# Altium PCB P502EA.PcbDoc
Units mm, origin at the board's own origin, x right, y up, seen from the top; angles counter-clockwise.
Board outline 25 x 69.4 mm, 4 copper layers (Top Layer, Int1, Int2, Bottom Layer), stack 1.547 mm thick; 3 components, 4 nets, 18 pads, 35 vias.
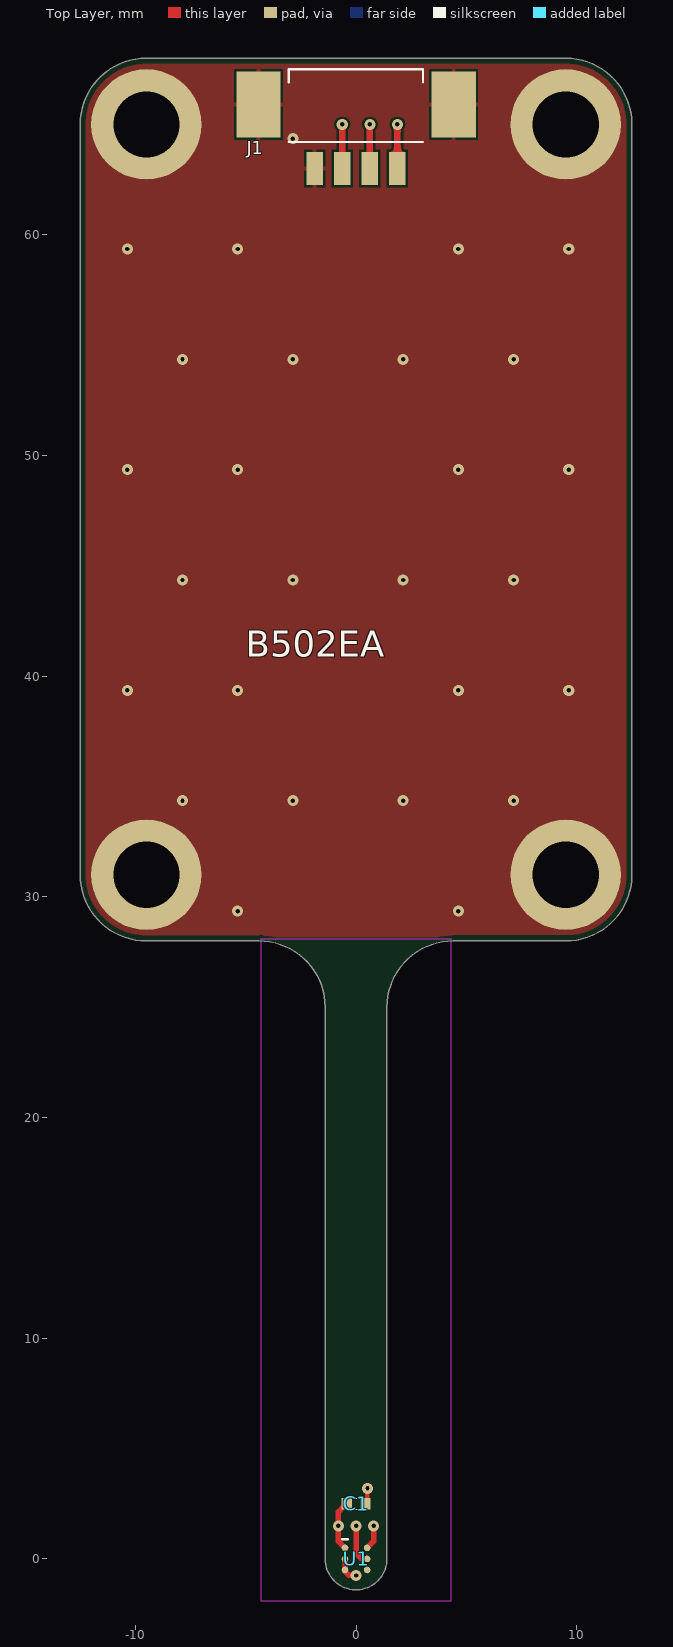
[diagram p0: Top Layer view]
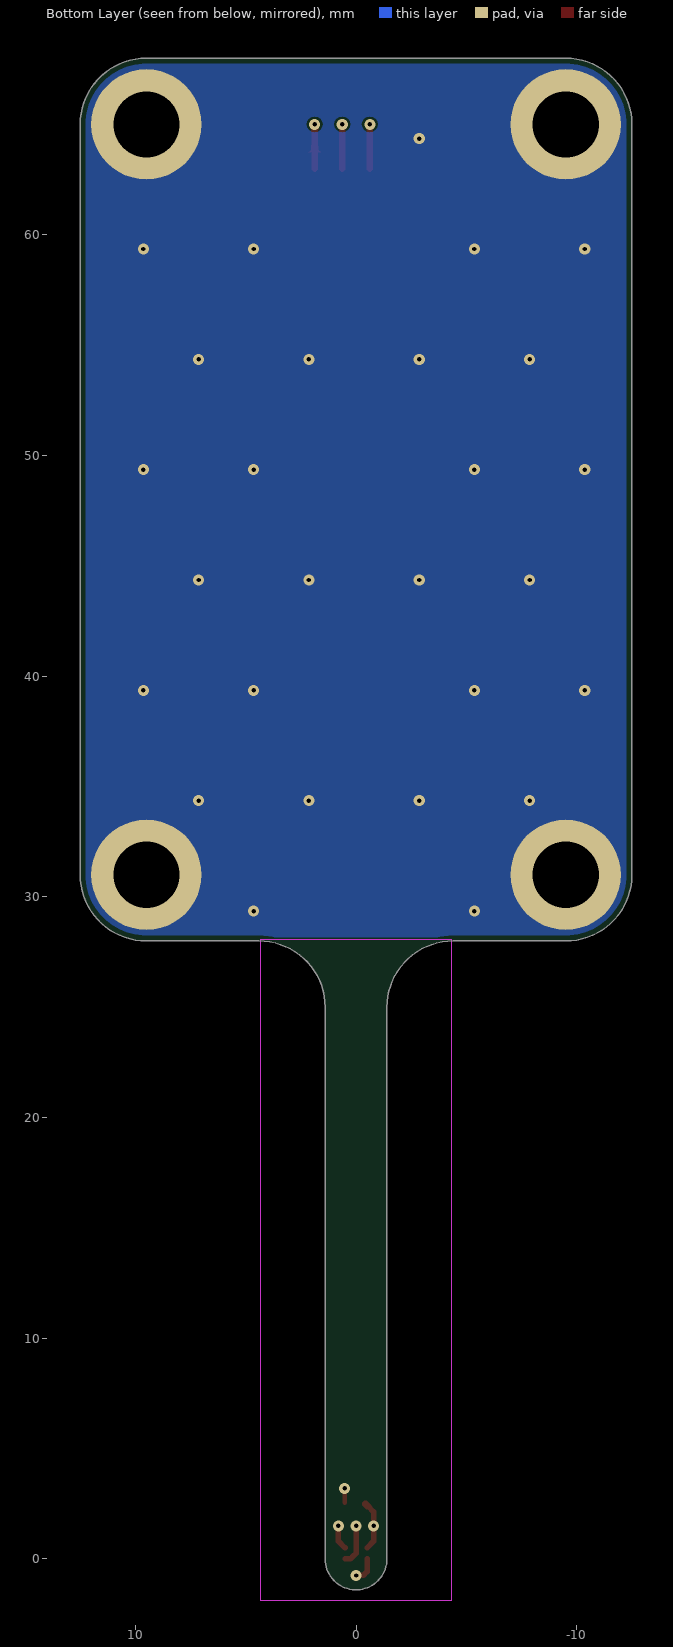
[diagram p1: Bottom Layer view, seen from below]
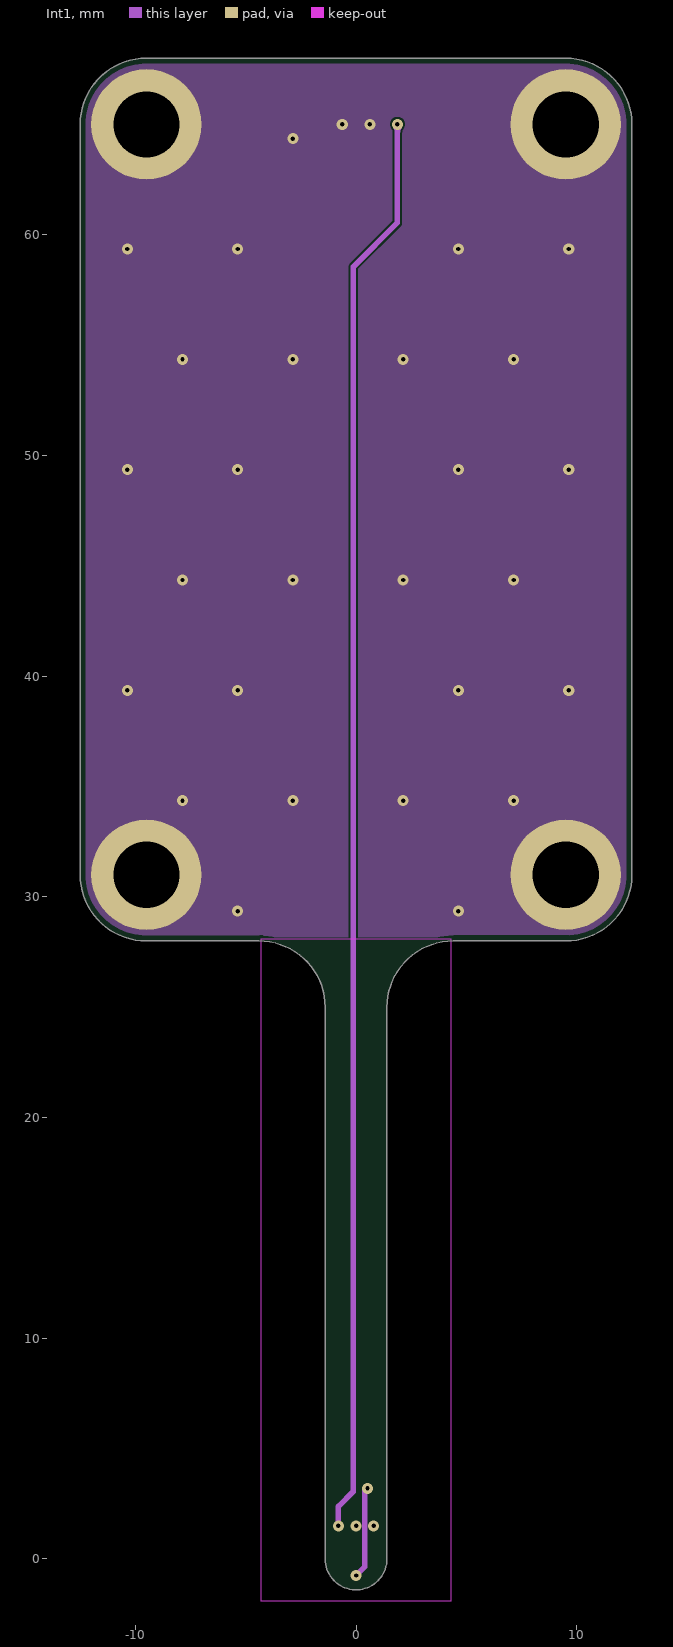
[diagram p2: Int1]
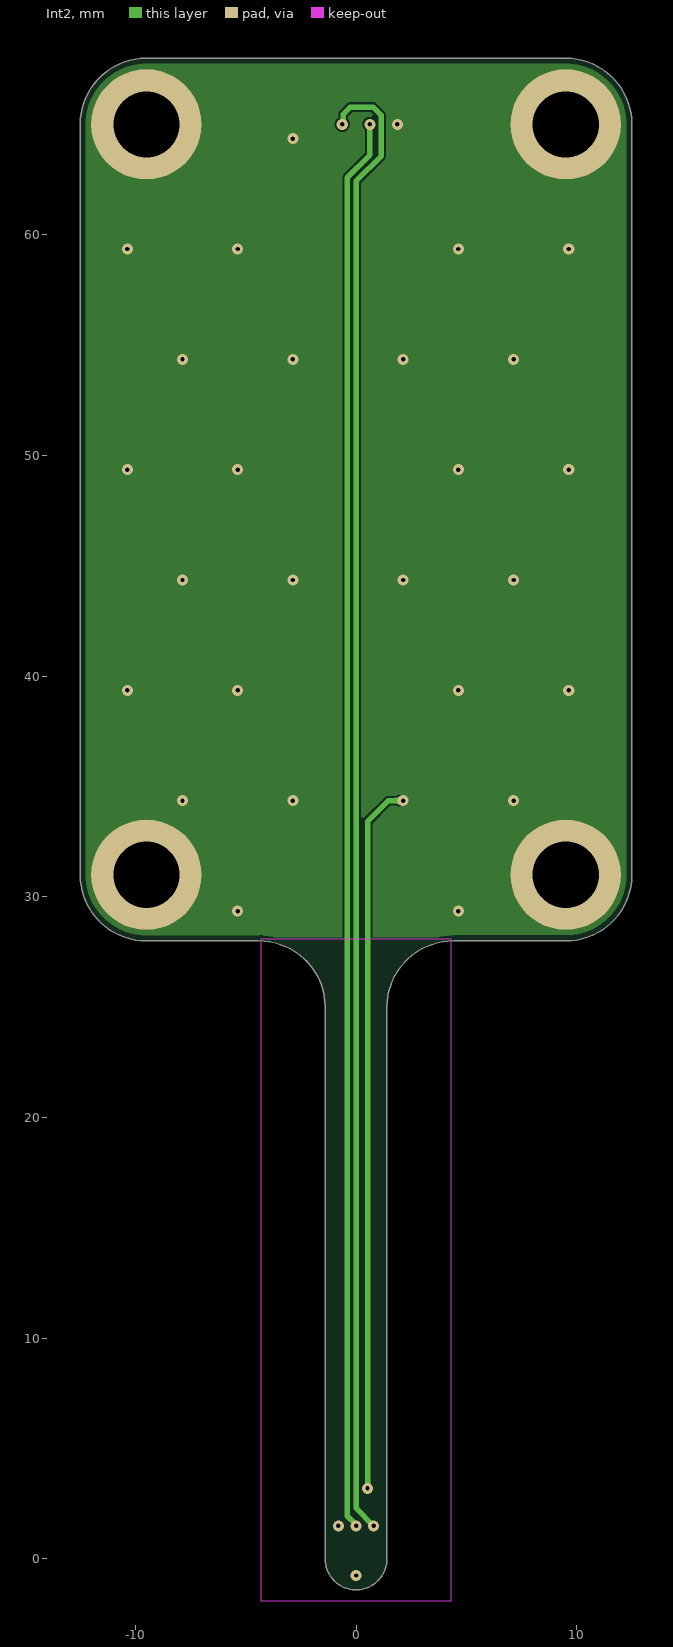
[diagram p3: Int2]
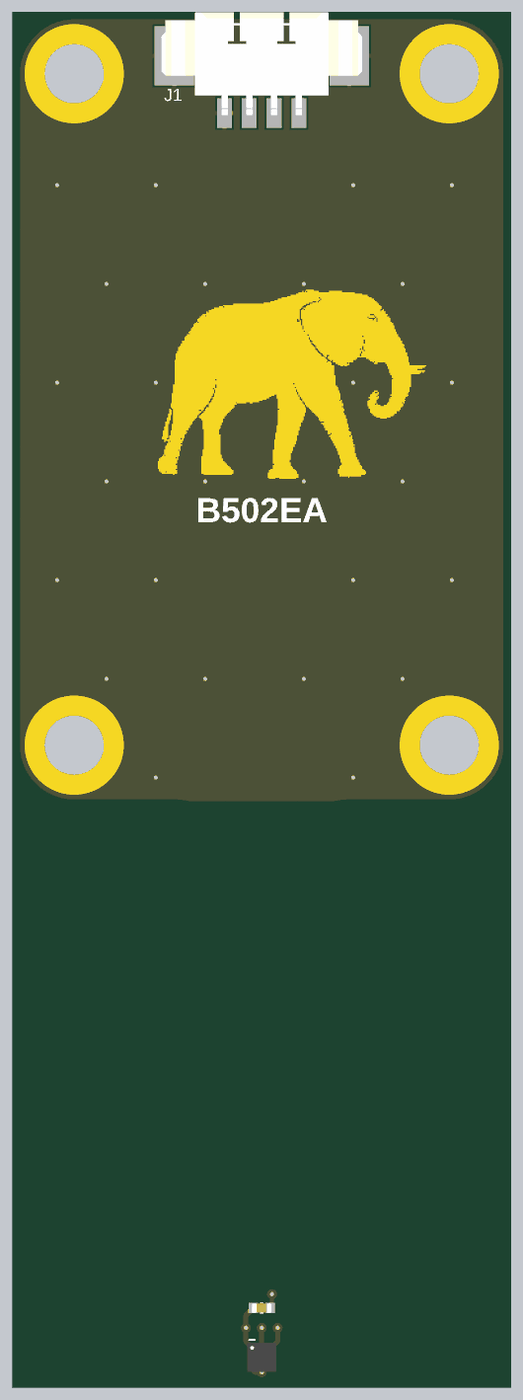
[diagram p4: 3D render of the assembled board from above, using the file's embedded part models]

## Layer stack, top to bottom
Top Solder: solder mask 0.0254, SM-001, Dk 4
Top Layer: signal copper 0.035
Dielectric 1: prepreg 0.2083, PP-022, Dk 4.5
Int1: signal copper 0.035
Dielectric 3: core 0.9906, Core-042, Dk 4.6
Int2: signal copper 0.035
Dielectric 5: prepreg 0.2083, PP-022, Dk 4.5
Bottom Layer: signal copper 0.035
Bottom Solder: solder mask 0.0254, SM-001, Dk 4

## Board outline
-9.5,28 cw(c-9.5,31) -12.5,31 -12.5,65 cw(c-9.5,65) -9.5,68 9.5,68 cw(c9.5,65) 12.5,65 12.5,31 cw(c9.5,31) 9.5,28 4.4,28 ccw(c4.4,25) 1.4,25 1.4,0 cw(c0,0) -1.4,0 -1.4,25 ccw(c-4.4,25) -4.4,28

## Design rules (kind name [scope] priority, off if disabled: settings)
BoardOutlineClearance [All] p1: gap=0.25 ignorepadtopadclearanceinfootprint=FALSE except(0: Arc-SplitContinuation Track-SplitContinuation SMDPad-SplitContinuation THPad-SplitContinuation Via-SplitContinuation Fill-SplitContinuation Poly-SplitContinuation Region-SplitContinuation Text-SplitContinuation)
Clearance Clearance-xPP-xTP-xTT [All] p1: gap=0.1 ignorepadtopadclearanceinfootprint=FALSE except(0: Arc-Hole Track-Hole SMDPad-Hole THPad-Hole Via-Hole Fill-Hole Poly-Hole Region-Hole Text-Hole)
ComponentClearance [All] p1: gap=0.25 collisioncheckmode=3 verticalgap=0.25 showdistances=FALSE
DiffPairsRouting [All] p1: maxlimit=0.25 minlimit=0.25 mostfreqgap=0.25 toplayer_minwidth=0.381 toplayer_maxwidth=0.381 toplayer_prefwidth=0.381 midlayer1_minwidth=0.381 midlayer1_maxwidth=0.381 midlayer1_prefwidth=0.381 midlayer2_minwidth=0.381 midlayer2_maxwidth=0.381 midlayer2_prefwidth=0.381 bottomlayer_minwidth=0.381 bottomlayer_maxwidth=0.381 bottomlayer_prefwidth=0.381 maxuncoupledlength=12.5
Height [All] p1: minheight=0 maxheight=25 prefheight=12.5
HoleSize HoleSize-PTH [All] p1: absolutevalues=TRUE maxlimit=5 minlimit=0.15 maxpercent=80.000 minpercent=20.000
HoleToHoleClearance [All] p1: gap=0.35 allowstackedmicrovias=TRUE
MinimumAnnularRing "Minimum IAR  <= 0.45mm" [((ObjectKind = 'Pad') OR (ObjectKind = 'Via')) And (Layer = 'MultiLayer') And (HoleDiameter <= AsMM(0.45))] p1: minimumring=0.125 // minimum inner annular ring for pads <= 0.45mm finished hole size
MinimumAnnularRing "Minimum IAR  > 0.45mm" [((ObjectKind = 'Pad') OR (ObjectKind = 'Via')) And (Layer = 'MultiLayer') And (HoleDiameter > AsMM(0.45))] p2: minimumring=0.125 // minimum inner annular ring for pads > 0.45mm finished hole size
MinimumAnnularRing Minimum-IAR [All] p3: minimumring=0.125
MinimumSolderMaskSliver [All] p1: minsoldermaskwidth=0.08
PlaneClearance [InNet('ANT_GSM')] p1: clearance=0.05
PlaneClearance PlaneClearance-IPI [All] p2: clearance=0.25
PlaneConnect [All] p1: planeconnectstyle=Relief reliefexpansion=0.175 reliefentries=4 reliefconductorwidth=0.2 reliefairgap=0.1
PolygonConnect PolygonConnect_Via [All vs (ObjectKind = 'Via') And (HoleDiameter <= AsMM(0.45))] p1: connectstyle=Direct reliefconductorwidth=0.254 reliefentries=4 polygonreliefangle="90 Angle" airgapwidth=0.254
PolygonConnect PolygonConnect-xTW [All] p2: connectstyle=Relief reliefconductorwidth=0.2 reliefentries=4 polygonreliefangle="90 Angle" airgapwidth=0.1
RoutingCorners [All] p1: cornerstyle=45-Degree minsetback=2.5 maxsetback=2.5
RoutingVias "RoutingVias <= 0.45mm" [(ObjectKind = 'Via') And (HoleDiameter <= AsMM(0.45))] p1: holewidth=0.2 width=0.55 viastyle="Through Hole" minholewidth=0.15 minwidth=0.5 maxholewidth=0.45 maxwidth=0.8
RoutingVias "RoutingVias > 0.45mm" [(ObjectKind = 'Via') And (HoleDiameter > AsMM(0.45))] p2: holewidth=0.5 width=0.85 viastyle="Through Hole" minholewidth=0.5 minwidth=0.85 maxholewidth=0.9 maxwidth=1.25
SilkToSilkClearance [All] p1: silktosilkclearance=0.2
SilkToSolderMaskClearance SilkscreenOverComponentPads [IsPad] p1: minsilkscreentomaskgap=0.1 clearancetoexposedcopper=TRUE
SolderMaskExpansion SolderMaskExpansion_Via [(ObjectKind = 'Via') And (HoleDiameter <= AsMM(0.45))] p1: expansion=0.01 istentingtop=TRUE soldermaskfromhole=TRUE
SolderMaskExpansion [All] p2: expansion=0.01 istentingtop=FALSE
UnRoutedNet [All] p1: checkbadconnections=TRUE
Width Width-xTW [All] p1: maxlimit=1.5 minlimit=0.1 preferedwidth=0.2
18 further rules are at their usual default settings.

## Components (designator, comment, footprint, x,y, rotation, side; value= is the part's Value field where it differs from the comment)
C1 "Capacitor - 100nF [0402] (Ceramic)" CAPACITOR_0402 0,2.5 r180 top value=100nF
J1 "4P SMD Tunic Connector" "Connector_Tunic 4P" 0,64 r180 top
U1 "HDC2010YPAR" HDC2010 0,0 r0 top

## Footprints (in the part's own frame and the unit in brackets; to place one, negate y for a bottom-side part, rotate by r counter-clockwise, add the part's x,y. Pads: shape width x height; smd on the part's side, far side on the other; paste and mask are expansions set on the pad)
CAPACITOR_0402 [mm] "Chip Capacitor, IPC High Density"
  rect 0.47x0.52 smd mask+0.01: 1(-0.43,0) 2(0.43,0)
  silkscreen extent -0.06,-0.25 0.06,0.25, body extent -0.5,-0.25 0.5,0.25, height 0.49
"Connector_Tunic 4P" [mm] "4P Tunic Connector"
  rect 0.75x1.5 smd mask+0.01: 1(-1.875,1) 2(-0.625,1) 3(0.625,1) 4(1.875,1)
  rect 2x3 smd mask+0.01: 5(-4.425,-1.9) 6(4.425,-1.9)
  silkscreen extent -3.03,-3.5 3.05,-0.2, body extent -5.07,-4.1 5.08,1.1, height 3.4
HDC2010 [mm]
  round 0.3 smd mask+0.01: A1(-0.5,0.5) A2(0.5,0.5) B1(-0.5,0) B2(0.5,0) C1(-0.5,-0.5) C2(0.5,-0.5)
  silkscreen extent -0.63,0.89 -0.37,0.89, body extent -0.73,-0.73 0.73,0.73, height 0.63

## Part data
C1: library part "Capacitor - 100nF [0402-6V3]", "Capacitor - 100nF [0402-6V3] (Ceramic)", Case=0402, Manufacturer Name=AVX, Manufacturer Part Number=04026D104KAT4A, Tolerance=%10, Voltage=6V3, ComponentLink1Description=Mouser, ComponentLink1URL=https://www.mouser.com.tr/ProductDetail/AVX/04026D104KAT4A?qs=sGAEpiMZZMs0AnBnWHyRQPg4iYkCw7IMED%2F4kpqgf7w%3D, ComponentLink2Description=DataSheet, ComponentLink2URL=https://www.mouser.com.tr/datasheet/2/40/cx5r-776519.pdf
J1: library part "Connector - Mini Tunic 4P (1.25)", "Mini Tunic Connector with 4P", Case=SMD, Manufacturer Name=Molex, Manufacturer Part Number=53261-0471, ComponentLink1Description=DataSheet, ComponentLink1URL=https://www.mouser.com.tr/datasheet/2/276/0532610471_PCB_HEADERS-170942.pdf, ComponentLink2Description=Mouser, ComponentLink2URL=https://www.mouser.com.tr/ProductDetail/Molex/53261-0471?qs=%2Fha2pyFaduhLhIsk8tywtK7BwWtguBSP4XxyDBTOTfs%3D, Pitch=1.25mm, Position=4, ROHS=Yes, System=Connector
U1: library part "IC - HDC2010", "GEN 2 HUMIDITY SENSOR", Case=DSBGA-6, Manufacturer Name="Texas Instruments", Maximum Operating Temperature="+ 85 C", Minimum Operating Temperature="- 40 C", Manufacturer Part Number=HDC2010YPAR, Product Type="T/H Sensor"

## Free pads (board coordinates)
  round 5 hole 3: 2(-9.5,31) 2(-9.5,65) 2(9.5,31) 2(9.5,65)

## Via types
v1: diameter 0.5, hole 0.2, Top Layer to Bottom Layer, tented both sides, 35 vias

## Nets (pads, with @x,y where several pads share a name; then routed paths per layer and width w, separated by ;. In a path a pad name is that pad's centre, name@x,y a point inside that pad or via, vN(x,y) a via of type N, cw(c..) or ccw(c..) an arc to the next point about the centre after c; other vN are vias at no path point)
3V3: C1.2 J1.1 U1.A1 | length 68.9
  Top Layer w0.25: C1.2@-0.54,2.39 -0.8,2.13 -0.8,0.8 U1.A1
  Top Layer w0.3: C1.2@-0.54,2.39 -0.515,2.39 -0.43,2.475 C1.2 ; J1.1 v1(1.875,65)
  Int1 w0.25: v1(-0.8,1.5) -0.8,2.375 -0.127,3.048 -0.127,58.547 1.875,60.549 v1(1.875,65)
GND: C1.1 J1.4 J1.5 J1.6 pad.2 U1.B1 U1.C1 | length 38.2
  Top Layer w0.2: C1.1@0.508,2.544 0.508,3.189 v1(0.519,3.2)
  Top Layer w0.25: U1.B1 U1.C1 -0.5,-0.576 -0.326,-0.75 v1(0,-0.75)
  Int1 w0.25: v1(0,-0.75) 0.4,-0.35 0.4,3.081 v1(0.519,3.2)
  Int2 w0.25: v1(0.519,3.2) 0.519,33.412 1.462,34.355 v1(2.137,34.355)
  other v1: -5.363,29.355 4.637,29.355 -7.863,34.355 -2.863,34.355 7.137,34.355 -10.363,39.355 -5.363,39.355 4.637,39.355 9.637,39.355 -7.863,44.355 -2.863,44.355 2.137,44.355 7.137,44.355 -10.363,49.355 -5.363,49.355 4.637,49.355 9.637,49.355 -7.863,54.355 -2.863,54.355 2.137,54.355 7.137,54.355 -10.363,59.355 -5.363,59.355 4.637,59.355 9.637,59.355 -2.863,64.355
I2C_CH1_SCL: J1.2 U1.B2 | length 67.9
  Top Layer w0.25: v1(0,1.5) 0,0.254 0.128,0.126 0.254,0 U1.B2
  Top Layer w0.3: J1.2 v1(0.625,65)
  Int2 w0.25: v1(0,1.5) 0,1.554 -0.4,1.954 -0.4,62.592 0.625,63.617 v1(0.625,65)
I2C_CH1_SDA: J1.3 U1.A2 | length 70.3
  Top Layer w0.25: U1.A2 0.8,0.8 v1(0.8,1.5)
  Top Layer w0.3: J1.3 v1(-0.625,65)
  Int2 w0.25: v1(-0.625,65) -0.587,65.038 -0.587,65.453 -0.254,65.786 0.762,65.786 1.143,65.405 1.143,63.569 0,62.426 0,2.3 v1(0.8,1.5)
pads on no net: U1.C2

## Polygon pours and split planes (outlines as drawn)
GND on Bottom Layer "BOTTOM_GND" (solid, pour order 3): -9.5,28 cw(c-9.5,31) -12.5,31 -12.5,65 cw(c-9.5,65) -9.5,68 9.5,68 cw(c9.5,65) 12.5,65 12.5,31 cw(c9.5,31) 9.5,28 4.4,28 ccw(c4.4,25) 1.4,25 1.4,0 cw(c0,0) -1.4,0 -1.4,25 ccw(c-4.4,25) -4.4,28
GND on Int1 "IN1_GND" (solid, pour order 1): -9.5,28 cw(c-9.5,31) -12.5,31 -12.5,65 cw(c-9.5,65) -9.5,68 9.5,68 cw(c9.5,65) 12.5,65 12.5,31 cw(c9.5,31) 9.5,28 4.4,28 ccw(c4.4,25) 1.4,25 1.4,0 cw(c0,0) -1.4,0 -1.4,25 ccw(c-4.4,25) -4.4,28
GND on Int2 "INT2_GND" (solid, pour order 2): -9.5,28 cw(c-9.5,31) -12.5,31 -12.5,65 cw(c-9.5,65) -9.5,68 9.5,68 cw(c9.5,65) 12.5,65 12.5,31 cw(c9.5,31) 9.5,28 4.4,28 ccw(c4.4,25) 1.4,25 1.4,0 cw(c0,0) -1.4,0 -1.4,25 ccw(c-4.4,25) -4.4,28
GND on Top Layer "TOP_GND" (solid, pour order 0): -9.5,28 cw(c-9.5,31) -12.5,31 -12.5,65 cw(c-9.5,65) -9.5,68 9.5,68 cw(c9.5,65) 12.5,65 12.5,31 cw(c9.5,31) 9.5,28 4.4,28 ccw(c4.4,25) 1.4,25 1.4,0 cw(c0,0) -1.4,0 -1.4,25 ccw(c-4.4,25) -4.4,28

## Keep-outs
Keep-Out Layer:
  rectangle: -4.318,-1.905 4.318,28.067

## Silkscreen, mask and mechanical layers (free items; w line width, h text height)
Top Overlay:
  text "B502EA" at -5,40.5 h2
Top Solder:
  region: 1402 vertices and 36 holes, not listed, extent -5.265,44.48 8.335,54.065
Board Shape:
  the board outline again, w0.254